# Altium PCB KC_BaseBoard4CompareTest-V0.2_NT_Pos_1.PcbDoc
Units mil, origin at the board's own origin, x right, y up, seen from the top; angles counter-clockwise.
Board outline 6947.83 x 3230.33 mil, 2 copper layers (Component Side, Bottom Layer), stack 12.8 mil thick; 47 components, 26 nets, 122 pads, 1 vias.
Unrouted connection lines stored in the file: 3.
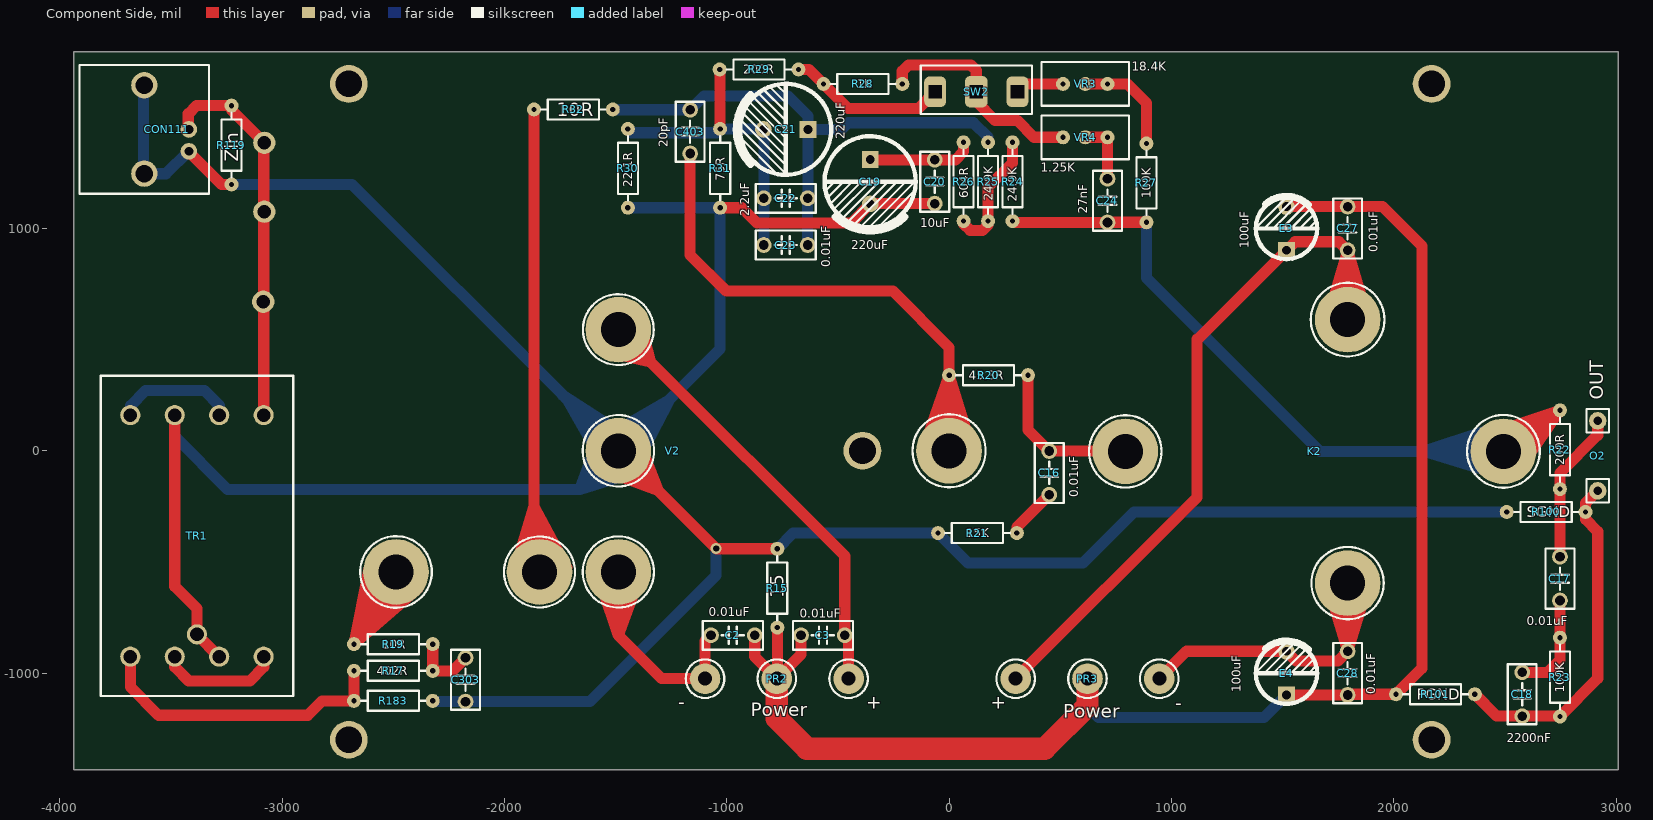
[diagram p0: Component Side view]
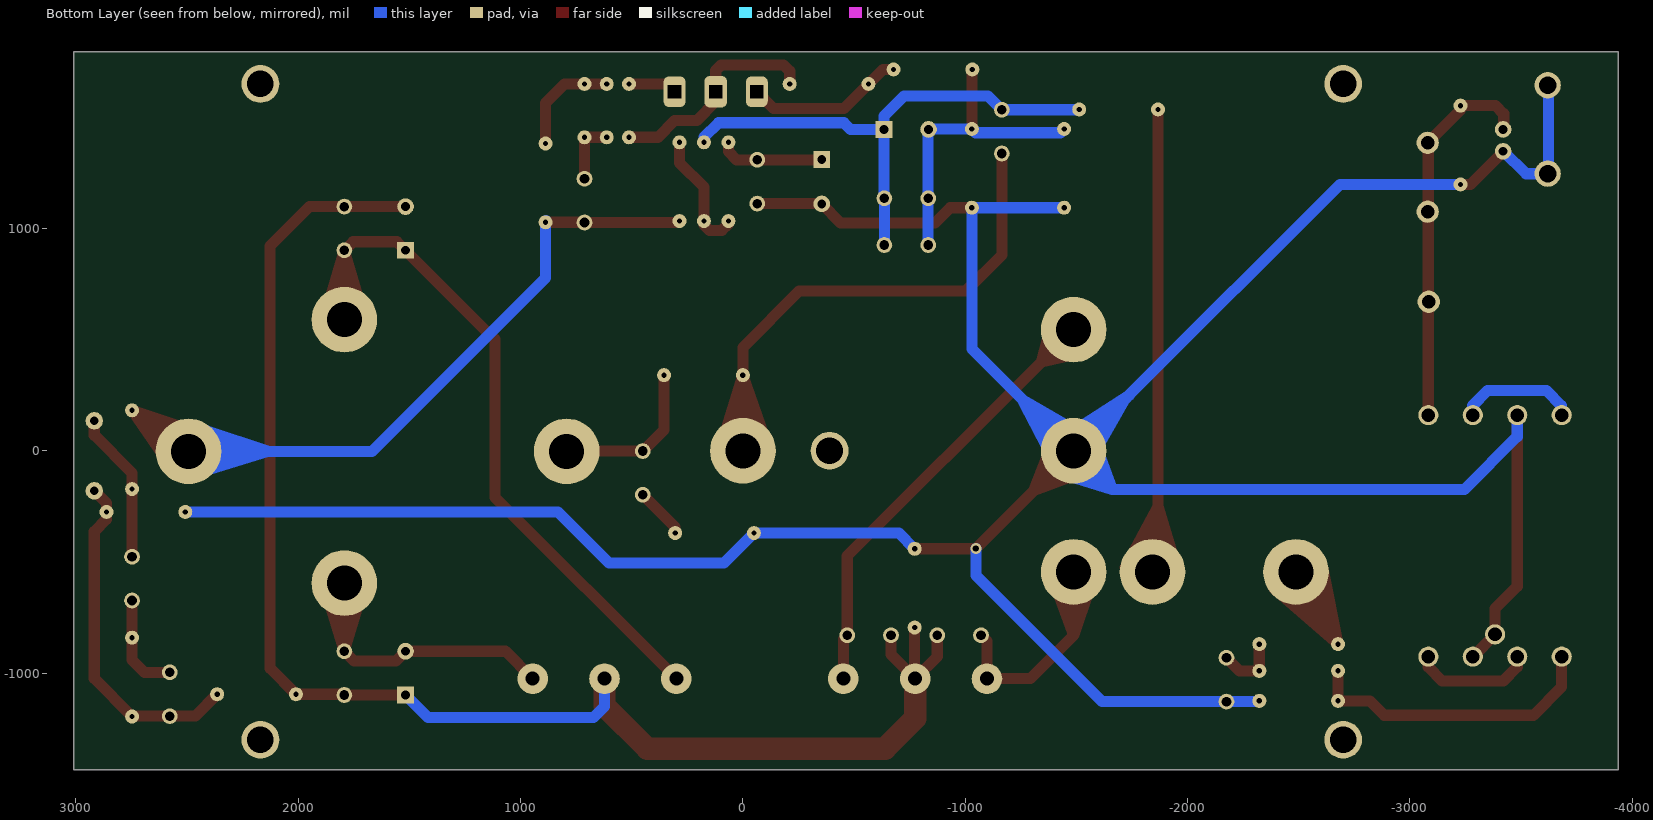
[diagram p1: Bottom Layer view, seen from below]

## Layer stack, top to bottom
Top Solder: solder mask 0.4, Solder Resist, Dk 3.5
Component Side: signal copper 1.4
Dielectric 1: core 10, FR-4, Dk 4.2
Bottom Layer: signal copper 1.4
Solder Side: solder mask 0.4, Solder Resist, Dk 3.5

## Board outline
-3937.83,-1435.33 3010,-1435.33 3010,1795 -3937.83,1795

## Design rules (kind name [scope] priority, off if disabled: settings)
Clearance [All] p1: gap=10 ignorepadtopadclearanceinfootprint=FALSE except(0: Arc-Hole Track-Hole SMDPad-Hole THPad-Hole Via-Hole Fill-Hole Poly-Hole Region-Hole Text-Hole)
PolygonConnect [All] p1: connectstyle=Relief reliefconductorwidth=10 reliefentries=4 polygonreliefangle="90 Angle" airgapwidth=10
RoomDefinition KC_BaseBoard4CompareTest-V0.2_NT_Pos_1 [InComponentClass('KC_BaseBoard4CompareTest-V0.2_NT_Pos_1')] p1: confinementstyle=ConfineIn formatcopy=TRUE lockcomponents=FALSE outline -9830.33,-7610.33 -7830.33,-7610.33 -7830.33,-6610.33 -9830.33,-6610.33
RoutingVias [All] p1: holewidth=28 width=50 viastyle="Through Hole" minholewidth=28 minwidth=50 maxholewidth=28 maxwidth=50
SolderMaskExpansion [All] p1: expansion=4
Width [All] p1: maxlimit=500 minlimit=10 preferedwidth=50
30 further rules are at their usual default settings.

## Components (designator, comment, footprint, x,y, rotation, side; value= is the part's Value field where it differs from the comment)
C2 "0.01uF" "CBB 6.3*6.3*5" -972.83,-830.33 r0 top
C3 "0.01uF" "CBB 6.3*6.3*5" -567.83,-830.33 r180 top
C16 "0.01uF" "CBB 6.3*6.3*5" 450,-100 r270 top
C17 "0.01uF" "CBB 6.3*6.3*5" 2747.17,-575.33 r90 top
C18 "2200nF" "CBB 6.3*6.3*5" 2577.17,-1095.33 r270 top
C19 "220uF" "CAP 5.0*10*20" -355,1210 r270 top
C20 "10uF" "CBB 6.3*6.3*5" -65,1210 r270 top
C21 "220uF" "CAP 5.0*10*20" -735,1445 r180 top
C22 "2.2uF" "CBB 6.3*6.3*5" -735,1135 r180 top
C23 "0.01uF" "CBB 6.3*6.3*5" -735,925 r180 top
C24 "27nF" "CBB 6.3*6.3*5" 712.17,1124.67 r90 top
C27 "0.01uF" "CBB 6.3*6.3*5" 1792.17,999.67 r90 top
C28 "0.01uF" "CBB 6.3*6.3*5" 1792.17,-1000.33 r270 top
C303 "20pF" "CBB 6.3*6.3*5" -2175,-1030 r90 top
C403 "20pF" "CBB 6.3*6.3*5" -1165,1435 r270 top
CON111 "RCA" RCA-RJ255 -3620,1445 r0 top
E3 "100uF" "CAP 5.0*6.5*12.5" 1517.17,999.67 r90 top
E4 "100uF" "CAP 5.0*6.5*12.5" 1517.17,-1000.33 r90 top
K2 "KCBuff" KCBUFF_M4 792.27,-2.83 r0 top
O2 "OUT" SIGNAL_TERMINAL 2917.17,134.67 r270 top
PR2 "Power" KC_MBPOWERREG4COMPARE-1.5MM -775,-1025.33 r270 top
PR3 "Power" KC_MBPOWERREG4COMPARE-1.5MM 622.17,-1025.33 r90 top
R15 "15" "RS 1/4W" -772.83,-618.17 r270 top
R17 "402R" "RS 1/4W" -2500,-990 r0 top
R19 "10R" "RS 1/4W" -2500,-870 r180 top
R20 "45.3R" "RS 1/4W" 177.17,339.67 r0 top
R21 "15K" "RS 1/4W" 127.17,-370.33 r180 top
R22 "200R" "RS 1/4W" 2747.17,4.67 r90 top
R23 "100K" "RS 1/4W" 2747.17,-1018.17 r270 top
R24 "24.9K" "RS 1/4W" 285,1210 r270 top
R25 "24.9K" "RS 1/4W" 175,1210 r270 top
R26 "604R" "RS 1/4W" 65,1210 r270 top
R27 "100K" "RS 1/4W" 887.17,1204.67 r90 top
R28 "1K" "RS 1/4W" -387.83,1649.67 r0 top
R29 "200R" "RS 1/4W" -855,1715 r180 top
R30 "22.1R" "RS 1/4W" -1445,1270 r90 top
R31 "75R" "RS 1/4W" -1030,1270 r90 top
R32 "10R" "RS 1/4W" -1690,1535 r180 top
R100 "SGND" "RS 1/4W" 2685,-275.33 r0 top
R101 "PGND" "RS 1/4W" 2187.17,-1095.33 r0 top
R119 "Zin" "RS 1/4W" -3227.83,1374.67 r270 top
R183 "47K" "RS 1/4W" -2500,-1125 r180 top
SW2 "SW-3P-2S" SS-12D06 122.17,1614.67 r0 top
TR1 "LL1527" LL1527 -3383,-383 r270 top
V2 "KCInputVas" KCIN_VAS_M4 -2487.83,-545.33 r0 top
VR3 "18.4K" "RS 1/2W-VR" 612.17,1649.67 r180 top
VR4 "1.25K" "RS 1/2W-VR" 612.17,1409.67 r180 top

## Footprints (in the part's own frame and the unit in brackets; to place one, negate y for a bottom-side part, rotate by r counter-clockwise, add the part's x,y. Pads: shape width x height; smd on the part's side, far side on the other; paste and mask are expansions set on the pad)
"CAP 5.0*6.5*12.5" [mm] "脚距5mm直径10mm高度12.5mm"
  rect 1.9x1.9 hole 1: 1(-2.5,0)
  round 1.9 hole 1: 2(2.5,0)
  silkscreen extent -3.5,-3.5 3.7,3.56, body extent -5,-5.01 5.01,4.99, height 12.55
"CAP 5.0*10*20" [mm] "脚距5mm直径10mm高度20mm"
  rect 1.9x1.9 hole 1: 1(-2.54,0)
  round 1.9 hole 1: 2(2.54,0)
  silkscreen extent -5.19,-5.21 5.69,5.19, body extent -5,-5 5.01,5, height 20.03
"CBB 6.3*6.3*5" [mm] "脚距5mm高6.3mm厚3mm"
  round 1.8 hole 1.1: 1(-2.5,0) 2(2.5,0)
  silkscreen extent -3.43,-1.65 3.43,1.65, body extent -3.15,-1.5 3.15,1.5, height 6.8
KC_MBPOWERREG4COMPARE-1.5MM [mm] "1.5mm hole size"
  round 3.5 hole 1.6: 1(0,8.2) 2(0,-8.2) 3(0,0)
  silkscreen extent -2.2,-10.4 2.2,10.4
KCBUFF_M4 [mm]
  round 7.5 hole 4: 1(0,0) 2(43.199,0) 3(25.397,15.05) 4(25.397,-15.05)
  silkscreen extent -4.13,-19.18 47.35,19.25
KCIN_VAS_M4 [mm]
  round 7.5 hole 4: 1(0,0) 2(16.396,0) 3(25.4,27.686) 4(25.4,0) 5(25.4,13.843) 6(63.183,13.843)
  silkscreen extent -4.09,-4.09 67.36,31.73
LL1527 [mm] "Lundahl LL1527"
  round 2.3 hole 1.55: 1(-13.8,-7.62) 2(-13.8,-2.54) 3(-13.8,2.54) 4(-13.8,7.62) 5(13.8,-7.62) 6(13.8,-2.54) 7(13.8,2.54) 8(13.8,7.62) 9(11.26,0)
  silkscreen extent -18.3,-11 18.3,11
RCA-RJ255 [mm] "RCA Socket"
  round 1.9 hole 1: 1(5.1,0) 2(5.1,-2.5)
  round 3 hole 2.02: 2(0,-5.05) 2(0,5.05)
  silkscreen extent -7.4,-7.35 7.4,7.35
"RS 1/2W-VR" [mm] "直插3脚顶调可调电阻，脚距2.54mm，长10mm*宽5mm*高10mm"
  round 1.6 hole 0.6: 1(-2.54,0) 2(2.54,0) 3(0,0)
  silkscreen extent -5,-2.5 5,2.5
"RS 1/4W" [mm] "直插色环电阻，脚距9mm，直径2.3mm"
  round 1.6 hole 0.6: 1(-4.5,0) 2(4.5,0)
  silkscreen extent -3.68,-1.14 3.68,1.14, body extent -4.72,-1.16 4.73,1.16, height 2.32
SIGNAL_TERMINAL [mm] "Signal Path Pin"
  round 2 hole 1: 1(0,0) 2(8,0)
  silkscreen extent -1.35,-1.3 9.35,1.3
SS-12D06 [mm]
  rrect50% 2.5x3.5 hole 1.5 square: 1(-4.7,0) 3(4.7,0)
  rrect50% 2.6x3.6 hole 1.5 square: 2(0,0)
  silkscreen extent -6.35,-2.54 6.35,3

## Part data
C2 C3 C16 C17 C18 C20 C22 C23 C24 C27 C28 C303 C403: library part C-CBB, "CBB电容", BOM名称=CBB电容, 学习资源=www.ooocke.com, 版权归属=源创客
C19 C21 E3 E4: library part C-CAP, "直插电解电容", BOM名称=直插电解电容, 学习资源=www.ooocke.com, 版权归属=源创客
CON111: "RCA Connector", Publisher="Altium Limited", Revision="17-Jul-2002: Re-released for DXP Platform."
K2: "King Cello Buffer Stage"
O2: library part Signal_Out, "Signal Out"
PR2 PR3: library part MainBoardPowerRegulator4CompareTest, "King Cello Compare Test Power"
R15 R17 R19 R20 R21 R22 R23 R24 R25 R26 R27 R28 R29 R30 R31 R32 R100 R101 R119 R183: library part R-CRR, "直插色环电阻", BOM名称=色环电阻, 学习资源=www.ooocke.com, 版权归属=源创客
SW2: "3 Pin 2 Switch"
TR1: "Lundahl LL1527"
V2: "King Cello Input Stage and VAS"
VR3 VR4: library part VR-W, "直插可调电阻-顶调"

## Free pads (board coordinates)
  round 170 hole 120: 2(-2700,-1300) 2(-2700,1650) 2(2170,-1300) 2(2170,1650) 6(-390,0)
  round 100 hole 60: 3(-3080,1385) 4(-3080,1075) 5(-3085,670)

## Via types
v1: diameter 50, hole 28, Component Side to Bottom Layer, 1 vias

## Nets (pads, with @x,y where several pads share a name; then routed paths per layer and width w, separated by ;. In a path a pad name is that pad's centre, name@x,y a point inside that pad or via, vN(x,y) a via of type N, cw(c..) or ccw(c..) an arc to the next point about the centre after c; other vN are vias at no path point)
GND: C2.2 C3.2 C27.2 C28.2 E3.2 E4.1 PR2.3 PR3.3 R15.2 R101.1 | length 6863.4
  Component Side w50: C2.2 -874.41,-925.93 PR2.3 PR2.3@-772.83,-1023.17 ; R15.2 PR2.3@-772.83,-1023.17 ; C3.2 -666.26,-916.59 PR2.3@-772.83,-1023.17 ; E4.1 C28.2 1795.59,-1095.33 R101.1 2127.17,-978.17 2127.17,919.67 1948.74,1098.09 C27.2 E3.2
  Component Side w100: PR2.3 -775,-1205 -640,-1340 430,-1340 622.17,-1147.83 PR3.3
  Bottom Layer w50: PR3.3 622.17,-1150.33 672.17,-1200.33 1415.59,-1200.33 E4.1
NetC2_1: C2.1 C28.1 E4.2 K2.4 PR2.2 PR3.2 V2.4 | length 3116.6
  Component Side w50: V2.4@-1557.83,-625.33 -1487.83,-830.33 ; V2.4 -1487.83,-830.33 ; V2.4@-1407.83,-610.33 -1487.83,-830.33 ; C2.1 -1097.83,-856.91 PR2.2 -1292.83,-1025.33 -1487.83,-830.33 ; PR3.2 1068.43,-901.91 E4.2 1560.59,-945.33 1748.74,-945.33 C28.1 ; K2.4@1727.17,-685.33 C28.1 ; K2.4 C28.1 ; K2.4@1862.17,-675.33 C28.1
NetC3_1: C3.1 C27.1 E3.1 K2.3 PR2.1 PR3.1 V2.3 | length 5890.2
  Component Side w50: V2.3@-1522.83,439.67 -1511.72,437.19 -1342.83,399.67 ; V2.3 -1342.83,399.67 ; V2.3@-1382.83,554.67 -1342.83,399.67 ; PR2.1 -452.17,-847.58 C3.1 -469.41,-473.76 -1342.83,399.67 ; PR3.1 1115,-209.67 1115,501.24 ; 1117.17,501.24 E3.1 1555.59,939.67 1753.74,939.67 C27.1 ; K2.3@1722.17,659.67 C27.1 ; K2.3 C27.1 ; K2.3@1862.17,664.67 C27.1
NetC16_1: C16.1 K2.1 R20.2 | length 723.7
  Component Side w50: R20.2 354.33,94.09 C16.1 791.01,-1.57 K2.1
NetC16_2: C16.2 R21.1 | length 232.2
  Component Side w50: R21.1 304.33,-344.09 C16.2
NetC17_1: C17.1 C17.2 C18.1 O2.1 R22.1 R23.1 | length 1142
  Component Side w50: C18.1 2690.59,-996.91 2747.17,-940.33 R23.1 C17.1 ; C17.2 R22.1 2747.17,-100.33 2917.17,69.67 O2.1
NetC18_2: C18.2 O2.2 R23.2 R100.2 R101.2 | length 1555.3
  Component Side w50: R101.2 2462.76,-1193.76 C18.2 2745.59,-1193.76 R23.2 2917.17,-1025.33 2917.17,-363.17 2862.17,-308.17 R100.2 2862.17,-235.3 O2.2
NetC19_1: C19.1 C20.1 R26.1 | length 477.5
  Component Side w50: C19.1@-355,1308.09 28.09,1308.09 65,1345 R26.1
NetC19_2: C19.2 C20.2 C303.1 CON111.2 R15.1 R21.2 R30.1 R31.1 R100.1 R119.2 R183.1 TR1.2 TR1.7 TR1.9 V2.5 | length 17938.8
  Component Side w50: TR1.2@-3502.83,159.67 -3482.83,159.67 -3482.83,-610.33 -3382.83,-710.33 -3382.83,-826.95 TR1.7@-3282.83,-926.95 ; CON111.2@-3422.05,1346.24 -3273.31,1197.5 R119.2 ; V2.5 -1307.83,-180.33 ; V2.5@-1482.83,-115.33 -1307.83,-180.33 ; V2.5@-1367.83,-25.33 -1307.83,-180.33 ; R31.1 -932.83,1092.83 -865,1025 -440,1025 C19.2 -353.43,1111.57 C20.2 ; R15.1 -1047.17,-441 v1(-1047.83,-440.33) -1307.83,-180.33
  Bottom Layer w50: CON111.2@-3622.83,1643.82 -3622.83,1249.02 -3620,1246.18 -3619.67,1245.85 -3522.44,1245.85 CON111.2@-3422.05,1346.24 ; TR1.2@-3482.83,159.67 -3482.83,62.83 -3245,-175 -1662.5,-175 ; R119.2 -2685.67,1197.5 -1737.83,249.67 ; R183.1 -2319.41,-1128.43 C303.1 -1615.93,-1128.43 -1047.83,-560.33 v1(-1047.83,-440.33) ; V2.5@-1595,10 -1662.5,-175 ; V2.5@-1590,-45 -1662.5,-175 ; V2.5@-1577.83,-15.33 -1717.83,229.67 ; V2.5@-1497.83,94.67 -1737.83,249.67 ; V2.5@-1472.83,104.67 -1257.83,229.67 ; V2.5@-1470,-75 -1662.5,-175 ; V2.5@-1465,-115 -1662.5,-175 ; R30.1 R31.1 -1030,457.5 -1257.83,229.67 ; V2.5@-1432.83,119.67 -1257.83,229.67 ; V2.5@-1392.83,24.67 -1257.83,229.67 ; V2.5@-1372.83,9.67 -1257.83,229.67 ; R15.1 -702.17,-370.33 R21.2 85,-505.33 602.17,-505.33 832.17,-275.33 R100.1 ; -1737.83,249.67 -1717.83,229.67 ; -1717.83,229.67 V2.5 ; -1662.5,-175 V2.5 ; V2.5 -1257.83,229.67
NetC21_1: C21.1 C22.1 C23.1 C403.1 R25.1 R32.1 | length 2394.1
  Bottom Layer w50: R32.1 -1511.26,1533.43 C403.1 -1103.43,1595 -725,1595 -635,1505 C21.1 ; C23.1 C22.1 -635,1136.57 C21.1 ; R25.1 175,1410 110,1475 -455,1475 -485,1445 C21.1
NetC21_2: C21.2 C22.2 C23.2 R29.2 R30.2 R31.2 | length 1414.5
  Component Side w50: R29.2 -1030,1712.83 R31.2
  Bottom Layer w50: R30.2 -1427.83,1430 -1047.17,1430 R31.2 -837.17,1447.17 C21.2 -833.43,1443.43 C22.2 C23.2
NetC24_1: C24.1 K2.2 R22.2 R24.2 R27.1 | length 4909.3
  Component Side w50: R24.2 291.59,1026.24 C24.1 713.43,1027.5 R27.1 ; K2.2 2562.5,-2.83 R22.2 ; K2.2@2532.17,109.67 R22.2 ; K2.2@2567.17,84.67 R22.2 ; K2.2@2607.17,-20.33 R22.2
  Bottom Layer w50: R27.1@885,1035 885,1029.67 R27.1 887.17,777.83 1667.83,-2.83 2132.17,-2.83 ; K2.2@2387.17,-55.33 2132.17,-2.83 ; K2.2@2397.17,54.67 2132.17,-2.83 ; K2.2@2402.17,-85.33 2132.17,-2.83 ; K2.2@2412.17,89.67 2132.17,-2.83 ; K2.2 2132.17,-2.83
NetC24_2: C24.2 VR4.1 VR4.3 | length 286.6
  Component Side w50: VR4.3 VR4.1 C24.2
NetC303_2: C303.2 R17.2 R19.1 | length 292
  Component Side w50: R19.1 R17.2 -2233.43,-990 C303.2
NetC403_2: C403.2 R20.1 V2.6 | length 3381.1
  Component Side w50: C403.2 -1165,880 -1002.5,717.5 -252.5,717.5 0,465 R20.1 ; V2.6@-92.83,69.67 R20.1 ; V2.6@-57.83,84.67 R20.1 ; V2.6 0,0 R20.1 ; V2.6@57.17,84.67 R20.1 ; V2.6@92.17,39.67 R20.1
NetCON111_1: CON111.1 pad.3 pad.4 pad.5 R119.1 TR1.4 | length 1732.3
  Component Side w50: CON111.1@-3422.05,1444.67 -3422.05,1515.45 -3385.67,1551.83 R119.1 -3227.83,1532.83 -3082.83,1387.83 TR1.4@-3082.83,159.67
NetR17_1: R17.1 R183.2 TR1.5 | length 1355.8
  Component Side w50: TR1.5@-3682.83,-926.95 -3682.83,-1062.17 -3555,-1190 -2885,-1190 -2820,-1125 R183.2 R17.1
NetR19_2: R19.2 V2.1 | length 1676
  Component Side w50: V2.1@-2610,-530 R19.2 ; V2.1@-2570,-600 R19.2 ; V2.1@-2510,-660 R19.2 ; V2.1 R19.2 ; V2.1@-2393.75,-620.9 V2.1@-2385,-610 ; V2.1@-2390,-620 -2408.68,-636.26 R19.2
NetR24_1: R24.1 R25.2 R26.2 | length 563.3
  Component Side w50: R26.2 65,1020 95,990 150,990 175,1015 R25.2 175,1185 285,1295 R24.1
NetR27_2: R27.2 VR3.1 VR3.3 | length 493
  Component Side w50: VR3.3 VR3.1 802.17,1649.67 887.17,1564.67 R27.2
NetR28_1: R28.1 R29.1 SW2.1 | length 718.7
  Component Side w50: R29.1 -630.33,1715 R28.1 -455,1539.67 -137.87,1539.67 SW2.1
NetR28_2: R28.2 SW2.2 VR4.2 | length 1008.6
  Component Side w50: R28.2 -210.67,1707.5 -183.5,1734.67 97.17,1734.67 122.17,1709.67 SW2.2 122.17,1569.67 207.17,1484.67 307.17,1484.67 382.17,1409.67 VR4.2
NetR32_2: R32.2 V2.2 | length 3172.1
  Component Side w50: V2.2@-1960,-555 -1947.18,-513.19 -1867.17,-252.17 ; V2.2@-1942.24,-581.02 V2.2@-1922.83,-635.33 ; V2.2@-1885,-440 -1867.17,-252.17 ; R32.2@-1867.17,1530 -1867.17,-252.17 ; V2.2 -1867.17,-252.17 ; V2.2@-1810,-430 -1867.17,-252.17 ; V2.2@-1806.42,-447.95 V2.2@-1772.83,-460.33 ; V2.2@-1720,-525 -1739.07,-489.64 -1867.17,-252.17
NetSW2_3: SW2.3 VR3.2 | length 219.5
  Component Side w50: SW2.3 342.2,1649.67 VR3.2
NetTR1_1: TR1.1 TR1.3 | length 541.6
  Bottom Layer w50: TR1.1@-3682.83,159.67 -3682.83,202.17 -3615,270 -3350,270 -3282.83,202.83 TR1.3@-3282.83,159.67
NetTR1_6: TR1.6 TR1.8 | length 542.9
  Component Side w50: TR1.6@-3482.83,-926.95 -3482.83,-972.17 -3420,-1035 -3145,-1035 -3082.83,-972.83 TR1.8@-3082.83,-926.95

## Silkscreen, mask and mechanical layers (free items; w line width, h text height)
Top Overlay:
  text "-" at -1217.83,-1160.33 h60
  text "+" at -372.83,-1160.33 h60
  text "+" at 187.17,-1160.33 h60
  text "-" at 1017.17,-1165.33 h60
Mechanical 1:
  lines w10: -3937.83,-1435.33 -3937.83,1800 3005,1800 3005,-1435.33 -3937.83,-1435.33
Drill Drawing:
  the board outline again, w10